# EAGLE board ProtoSnap-v14a (EAGLE 5.06)
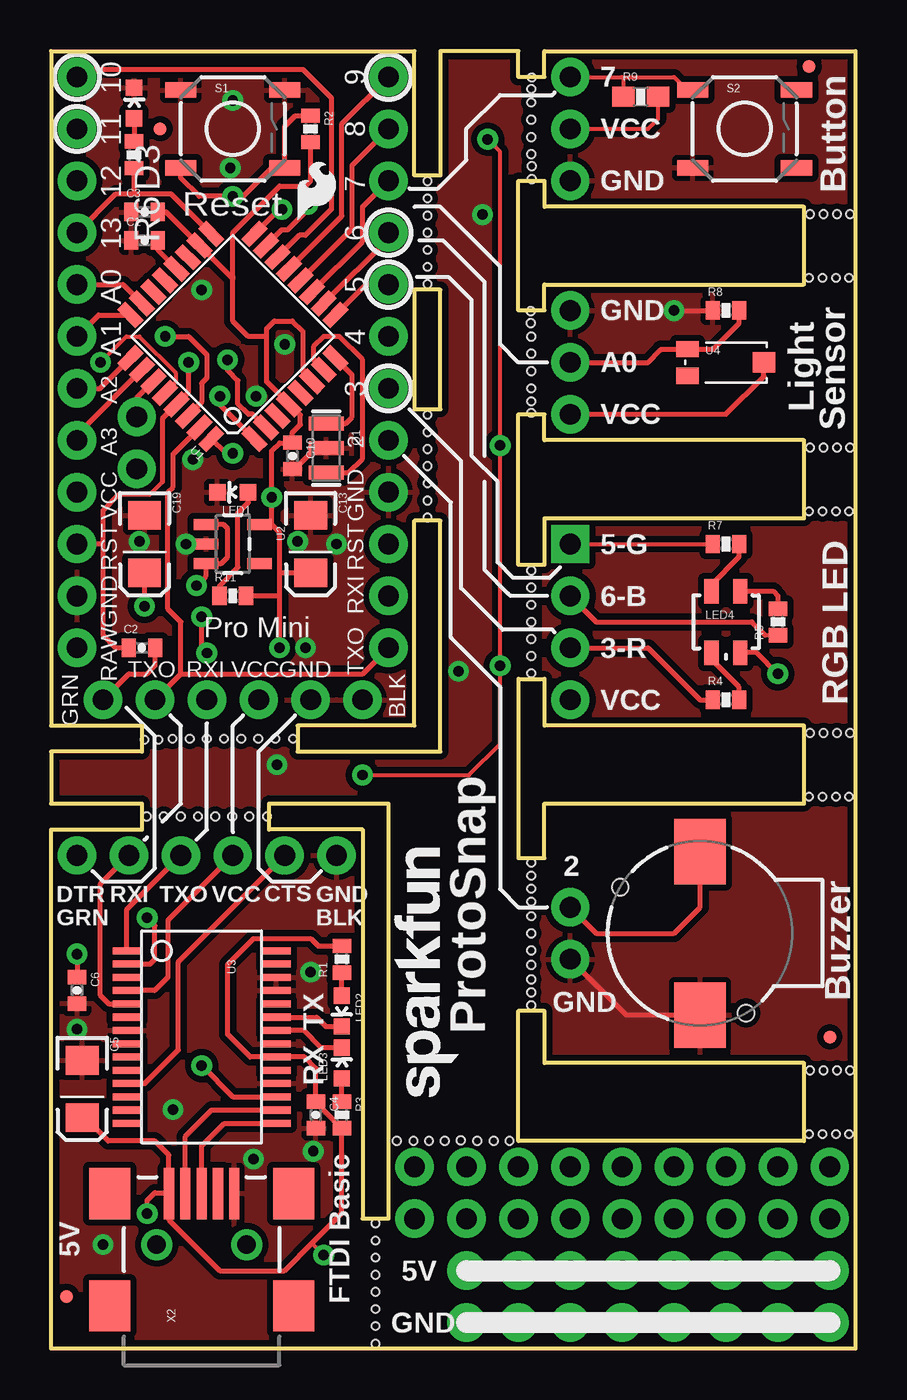
[diagram p0: board, top side]
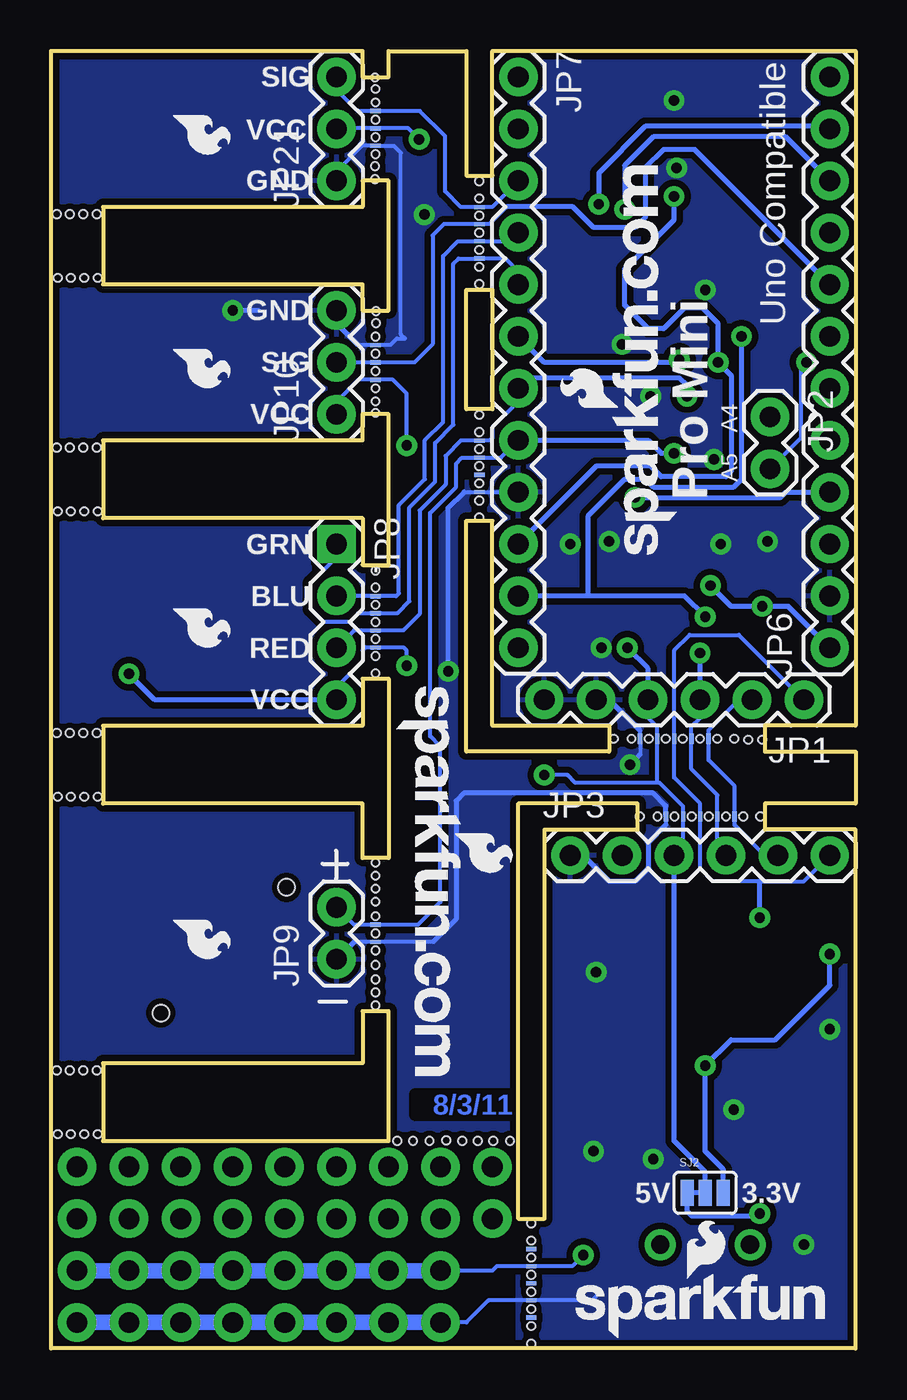
[diagram p1: board, bottom side, seen from below]

Size 39.37 x 63.5 mm. Coordinates in mm from the lower left corner, seen from the top.
Outline: 36.83,13.97 24.13,13.97 24.13,16.51 22.86,16.51 22.86,10.16 36.83,10.16 36.83,13.97
Outline: 24.13,26.67 36.83,26.67 36.83,30.48 24.13,30.48 24.13,32.77 22.86,32.77 22.86,24 24.13,24 24.13,26.67
Outline: 24.13,40.64 36.83,40.64 36.83,44.45 24.13,44.45 24.13,45.72 22.86,45.72 22.86,38.35 24.13,38.35 24.13,40.64
Outline: 36.83,55.88 24.13,55.88 24.13,57.15 22.86,57.15 22.86,50.8 24.13,50.8 24.13,52.07 36.83,52.07 36.83,55.88
Outline: 24.13,63.5 39.37,63.5 39.37,0 0,0 0,25.4 4.45,25.4 4.45,26.67 0,26.67 0,29.21 4.45,29.21 4.45,30.48 0,30.48 0,63.5 17.78,63.5 17.78,57.4 19.05,57.4 19.05,63.5 22.86,63.5 22.86,62.23 24.13,62.23 24.13,63.5
Outline: 17.78,30.48 17.78,40.51 19.05,40.51 19.05,29.21 12.06,29.21 12.06,30.48 17.78,30.48
Outline: 15.24,25.4 15.24,6.35 16.51,6.35 16.51,26.67 10.67,26.67 10.67,25.4 15.24,25.4
Outline: 17.78,45.97 19.05,45.97 19.05,51.82 17.78,51.82 17.78,45.97
Copper layers (1*16): Top 0.035mm / dielectric 1.5mm / Bottom 0.035mm
Design rules "SparkFun *": minimum track width 8mil, minimum drill 20mil, track to track 8mil, track to pad 8mil, pad to pad 8mil, via to via 8mil, smd to smd 8mil, copper to edge 8mil, drill to drill 8mil, minimum pad ring 12mil, minimum via ring 10mil, stop-mask expansion 4mil, vias tented up to drill 20mil, thermal gap 10mil
Net classes: 0 default: width 0.203 mm; 1 power: width 0.254 mm
Holes 0.38 mm at 19.25,10.16 20.85,10.16 21.67,10.16 20.04,10.19 22.43,10.16 5.26,29.79 4.57,29.79 16.92,10.16 17.73,10.16 18.49,10.16 23.5,18.77 23.5,18.06 23.5,22.5 23.5,21.87 23.5,46.35 23.5,45.8 23.47,50.19 23.47,50.77 23.52,57.86 23.52,57.23 23.5,61.65 23.52,62.2 23.5,23.77 23.5,23.14 23.5,17.42 23.5,16.79 37.8,55.52 38.46,55.52 39.09,55.52 37.13,55.52 37.74,52.4 38.4,52.4 39.04,52.4 37.08,52.4 37.8,44.09 38.46,44.09 39.09,44.09 37.13,44.09 37.74,40.97 38.4,40.97 39.04,40.97 37.08,40.97 37.8,30.12 38.46,30.12 39.09,30.12 37.13,30.12 37.74,27 38.4,27 39.04,27 37.08,27 37.8,13.61 38.46,13.61 39.09,13.61 37.13,13.61 37.74,10.49 38.4,10.49 39.04,10.49 37.08,10.49

## Footprints (pad centres in the part's own frame; a part is rotated, then mirrored left to right if it is on the bottom)
0402-CAP = smd 0.7 x 0.9: 1 -0.65,0; 2 0.65,0
EIA3216 = smd 1.4 x 1.6: A 1.4,0; C -1.4,0
LED-0603 = smd 0.8 x 0.8: A 0,-0.75; C 0,0.75
1X06 = drill 1.016 pad 1.88 round: 1 0,0; 2 2.54,0; 3 5.08,0; 4 7.62,0; 5 10.16,0; 6 12.7,0
1X02 = drill 1.016 pad 1.88 round: 1 0,0; 2 2.54,0
1X12 = drill 1.016 pad 1.88 round: 1 0,0; 2 2.54,0; 3 5.08,0; 4 7.62,0; 5 10.16,0; 6 12.7,0; 7 15.24,0; 8 17.78,0; 9 20.32,0; 10 22.86,0; 11 25.4,0; 12 27.94,0
1X04 = drill 1.016 pad 1.88 square: 1 0,0 | drill 1.016 pad 1.88 round: 2 2.54,0; 3 5.08,0; 4 7.62,0
1X03 = drill 1.016 pad 1.88 round: 1 0,0; 2 2.54,0; 3 5.08,0
FIDUCIAL-1X2.5 = smd 0.635 x 0.635: 1 0,0
LED-TRICOLOR-SMD = smd 0.7 x 1.2: A 0.7,-1.5; B 0.7,1.5; G -0.7,1.5; R -0.7,-1.5
RESONATOR-SMD = smd 0.7 x 1.7: 1 -1.2,0; 2 0,0; 3 1.2,0
0402-RES = smd 0.7 x 0.9: 1 -0.65,0; 2 0.65,0
0603-RES = smd 1.1 x 1: 1 -0.85,0; 2 0.85,0
TACTILE_SWITCH_SMD = smd 1.524 x 0.762: 1 -2.54,1.905; 2 2.54,1.905; 3 -2.54,-1.905; 4 2.54,-1.905
BUZZER-CCV = smd 3.2 x 2.5: + 4,0; - -4,0 | hole 0.8: -3.9,-2.25; 2.25,3.9
SJ_3 = smd 0.635 x 1.27: 1 -0.889,0; 2 0,0; 3 0.889,0
TQFP32-08 = smd 1.27 x 0.559: 1 -4.293,2.8; 2 -4.293,2; 3 -4.293,1.2; 4 -4.293,0.4; 5 -4.293,-0.4; 6 -4.293,-1.2; 7 -4.293,-2; 8 -4.293,-2.8; 17 4.293,-2.8; 18 4.293,-2; 19 4.293,-1.2; 20 4.293,-0.4; 21 4.293,0.4; 22 4.293,1.2; 23 4.293,2; 24 4.293,2.8 | smd 0.559 x 1.27: 9 -2.8,-4.293; 10 -2,-4.293; 11 -1.2,-4.293; 12 -0.4,-4.293; 13 0.4,-4.293; 14 1.2,-4.293; 15 2,-4.293; 16 2.8,-4.293; 25 2.8,4.293; 26 2,4.293; 27 1.2,4.293; 28 0.4,4.293; 29 -0.4,4.293; 30 -1.2,4.293; 31 -2,4.293; 32 -2.8,4.293
SOT23-5 = smd 0.55 x 1.2: 1 -0.95,-1.3; 2 0,-1.3; 3 0.95,-1.3; 4 0.95,1.3; 5 -0.95,1.3
SSOP28DB = smd 0.348 x 1.397: 1 -4.225,-3.656; 2 -3.575,-3.656; 3 -2.925,-3.656; 4 -2.275,-3.656; 5 -1.625,-3.656; 6 -0.975,-3.656; 7 -0.325,-3.656; 8 0.325,-3.656; 9 0.975,-3.656; 10 1.625,-3.656; 11 2.275,-3.656; 12 2.925,-3.656; 13 3.575,-3.656; 14 4.225,-3.656; 15 4.225,3.656; 16 3.575,3.656; 17 2.925,3.656; 18 2.275,3.656; 19 1.625,3.656; 20 0.975,3.656; 21 0.325,3.656; 22 -0.325,3.656; 23 -0.975,3.656; 24 -1.625,3.656; 25 -2.275,3.656; 26 -2.925,3.656; 27 -3.575,3.656; 28 -4.225,3.656
TEMT6000-SEN = smd 1.1 x 0.8: BASE -1.87,-0.65; EMITTER -1.87,0.65 | smd 1.1 x 1: COLLECTOR 1.86,0.01
MOUSE-BITE-3 = smd 0.203 x 0.508 bottom: P$1 -0.851,0; P$2 0,0; P$3 0.851,0 | hole 0.381: -1.27,0; -0.432,0; 0.432,0; 1.27,0
MOUSE-BITE-5 = smd 0.203 x 0.508 bottom: P$1 -1.689,0; P$2 -0.851,0; P$3 -0.013,0; P$4 0.826,0; P$5 1.664,0 | hole 0.381: -2.108,0; -1.27,0; -0.432,0; 0.406,0; 1.245,0; 2.083,0; -2.946,0; 2.946,0
MOUSE-BITE-2 = smd 0.203 x 0.508 bottom: P$1 -0.419,0; P$2 0.419,0 | hole 0.381: -0.838,0; 0,0; 0.838,0
MOUSE-BITE-4 = smd 0.203 x 0.508 bottom: P$1 -1.257,0; P$2 -0.419,0; P$3 0.419,0; P$4 1.257,0 | hole 0.381: -1.676,0; -0.838,0; 0,0; 0.838,0; 1.676,0; 2.515,0; -2.515,0
USB-MINIB-NOSTOP = smd 2.5 x 0.5: D+ 2.5,0; D- 2.5,0.8; GND 2.5,-1.6; ID 2.5,-0.8; VBUS 2.5,1.6 | smd 2.5 x 2: G1 -3,-4.5; G2 -3,4.5; G3 2.5,4.5; G4 2.5,-4.5 | drill 0.9 pad 0.8 round: H1 0,2.2 | drill 0.9 pad 0.787 round: H2 0,-2.2

## Placement (x,y rotation side)
C1  0.1uF  [0402-CAP]  4.57,54.23 0 top
C2  0.1uF  [0402-CAP]  4.45,34.29 0 top
C3  0.1uF  [0402-CAP]  4.57,55.63 0 top
C4  0.1uF  [0402-CAP]  12.95,11.43 270 top
C5  10uF  [EIA3216]  1.52,12.7 270 top
C6  0.1uF  [0402-CAP]  1.27,17.53 270 top
C10  0.1uF  [0402-CAP]  11.81,43.69 270 top
C13  10uF  [EIA3216]  12.7,39.37 270 top
C19  10uF  [EIA3216]  4.57,39.37 270 top
D3  Green  [LED-0603]  4.06,60.96 0 top
JP1  FTDI Basic  [1X06]  2.54,31.75 180 bottom
JP2  [1X02]  4.19,45.59 270 bottom
JP3  [1X06]  13.97,24.13 0 bottom
JP4  LOGO-SFENW2  [SFE-NEW-WEB]  13.72,0.51 0 bottom
JP5  LOGO-SFESK  [SFE-LOGO-FLAME]  8.26,3.43 0 bottom
JP6  [1X12]  1.27,34.29 90 bottom
JP7  [1X12]  16.51,62.23 270 bottom
JP8  [1X04]  25.4,39.37 270 bottom
JP9  [1X02]  25.4,19.05 90 bottom
JP10  [1X03]  25.4,45.72 90 bottom
JP11  LOGO-SFESK  [SFE-LOGO-FLAME]  33.4,20.95 270 bottom
JP12  LOGO-SFENW2  [SFE-NEW-WEB]  19.94,12.32 90 top
JP13  LOGO-SFESK  [SFE-LOGO-FLAME]  33.4,36.2 270 bottom
JP14  LOGO-SFESK  [SFE-LOGO-FLAME]  33.4,60.33 270 bottom
JP15  LOGO-SFESK  [SFE-LOGO-FLAME]  33.4,48.9 270 bottom
JP16  FIDUCIAL1X2.5  [FIDUCIAL-1X2.5]  0.76,2.54 0 top
JP18  LOGO-SFENEW  [SFE-NEW-WEBLOGO]  22.48,32.38 270 bottom
JP19  FIDUCIAL1X2.5  [FIDUCIAL-1X2.5]  5.33,59.69 0 top
JP20  FIDUCIAL1X2.5  [FIDUCIAL-1X2.5]  38.1,15.24 0 top
JP21  [1X03]  25.4,57.15 90 bottom
JP22  FIDUCIAL1X2.5  [FIDUCIAL-1X2.5]  37.08,62.74 0 top
LED1  Red  [LED-0603]  8.89,41.91 90 top
LED2  Red  [LED-0603]  14.22,16.51 180 top
LED3  Green  [LED-0603]  14.22,13.97 0 top
LED4  LED-TRICOLOR  [LED-TRICOLOR-SMD]  33.02,35.56 0 top
Q1  16MHz  [RESONATOR-SMD]  13.46,44.07 270 top
R1  1K  [0402-RES]  14.22,19.05 90 top
R2  10K  [0402-RES]  12.7,59.69 270 top
R3  1K  [0402-RES]  14.22,11.43 270 top
R4  200  [0402-RES]  33.02,31.75 0 top
R5  100  [0402-RES]  35.56,35.56 90 top
R6  330  [0402-RES]  4.06,58.42 90 top
R7  100  [0402-RES]  33.02,39.37 0 top
R8  10k  [0402-RES]  33.02,50.8 0 top
R9  10K  [0603-RES]  28.85,61.26 0 top
R11  10K  [0402-RES]  8.89,36.83 0 top
S1  Reset  [TACTILE_SWITCH_SMD]  8.89,59.69 0 top
S2  SWITCH-MOMENTARY-2SMD  [TACTILE_SWITCH_SMD]  33.93,59.69 0 top
SG1  BUZZERSMD2  [BUZZER-CCV]  31.75,20.32 90 top
SJ2  [SJ_3]  7.37,7.62 0 bottom
U1  ATMEGA328  [TQFP32-08]  8.89,49.53 135 top
U2  MIC5205  [SOT23-5]  8.89,39.37 270 top
U3  FT232RLSSOP  [SSOP28DB]  7.37,15.24 270 top
U4  TEMT6000  [TEMT6000-SEN]  33.02,48.26 0 top
U$1  LOGO-SFESK  [SFE-LOGO-FLAME]  12.06,55.24 0 top
U$2  MOUSE-BITE-3  [MOUSE-BITE-3]  23.5,59.72 90 top
U$4  MOUSE-BITE-5  [MOUSE-BITE-5]  15.88,3.17 270 top
U$7  MOUSE-BITE-2  [MOUSE-BITE-2]  23.5,20.32 270 top
U$8  MOUSE-BITE-4  [MOUSE-BITE-4]  23.5,35.56 90 top
U$9  MOUSE-BITE-3  [MOUSE-BITE-3]  23.5,48.26 90 top
U$11  LOGO-SFENEW  [SFE-NEW-WEBLOGO]  8.76,38.86 90 bottom
U$13  MOUSE-BITE-4  [MOUSE-BITE-4]  18.41,54.61 90 top
U$14  MOUSE-BITE-4  [MOUSE-BITE-4]  18.41,43.18 90 top
U$22  MOUSE-BITE-5  [MOUSE-BITE-5]  8.89,29.84 0 top
U$23  MOUSE-BITE-5  [MOUSE-BITE-5]  7.62,26.04 0 top
X2  USB-SMD-NS  [USB-MINIB-NOSTOP]  7.37,5.08 90 top

## Library data of the parts
C1-C6 C10 C13 C19 D3 JP1-JP15 JP18 JP21 LED1-LED4 Q1 R1-R9 R11 S1 S2 SG1 SJ2 U1-U4 U$1 U$2 U$4 U$7-U$9 U$11 U$13 U$14 U$22 U$23 X2 = SparkFun
JP16 JP19 JP20 JP22 = abes

## Nets
3.3V [power]: C6.1 SJ2.3 U3.17
5V: C4.1 C5.A R1.2 R3.2 SJ2.1 U3.20 U$4.P$2 X2.VBUS
A0: JP6.8 JP10.2 R8.2 U1.23 U4.EMITTER U$9.P$2 U$13.P$3
A1: JP6.7 U1.24
A2: JP6.6 U1.25
A3: JP6.5 U1.26
A4: JP2.1 U1.27
A5: JP2.2 U1.28
AREF: C1.2 U1.20
CTS: JP3.2 U3.11
D2: JP7.8 JP9.2 SG1.+ U1.32 U$7.P$1 U$14.P$3
D3: JP7.7 JP8.3 R4.1 U1.1 U$8.P$2 U$14.P$4
D4: JP7.6 U1.2
D5: JP7.5 JP8.1 R7.1 U1.9 U$8.P$3 U$13.P$1
D6: JP7.4 JP8.2 R5.1 U1.10 U$8.P$4 U$13.P$2
D7: JP7.3 JP21.3 R9.1 S2.1 U1.11 U$2.P$3 U$13.P$4
D8: JP7.2 U1.12
D9: JP7.1 U1.13
D10: JP6.12 U1.14
DTR: C2.2 JP1.1 JP3.6 U3.2 U$22.P$3 U$23.P$3
GND [power]: C1.1 C3.1 C4.2 C5.C C6.2 C10.2 C13.C C19.C D3.C JP1.5 JP1.6 JP3.1 JP6.2 JP7.9 JP9.1 JP10.3 JP21.1 LED1.C Q1.2 R8.1 S1.1 S1.2 S2.3 SG1.- U1.3 U1.5 U1.21 U2.2 U3.7 U3.18 U3.21 U3.25 U3.26 U$2.P$1 U$4.P$4 U$7.P$2 U$9.P$3 U$14.P$1 U$22.P$5 U$23.P$5 X2.GND
MISO: JP6.10 U1.16
MOSI: JP6.11 U1.15
N$1: Q1.1 U1.8
N$2: Q1.3 U1.7
N$3: LED2.A R1.1
N$4: LED3.A R3.1
N$6: LED4.R R4.2
N$7: D3.A R6.2
N$8: LED4.B R5.2
N$9: LED4.G R7.2
N$38: LED1.A R11.1
RAW [power]: C19.A JP6.1 U2.1 U2.3
RESET: C2.1 JP6.3 JP7.10 R2.1 S1.3 S1.4 U1.29
RX-I: JP1.2 JP3.5 JP7.12 U1.31 U3.5 U$22.P$1 U$23.P$1
RXLED: LED3.C U3.22
SCK: JP6.9 R6.1 U1.17
TX-O: JP1.3 JP3.4 JP7.11 U1.30 U3.1 U$22.P$2 U$23.P$2
TXLED: LED2.C U3.23
USB_D+: U3.15 X2.D+
USB_D-: U3.16 X2.D-
VCC: C3.2 C10.1 C13.A JP1.4 JP3.3 JP6.4 JP8.4 JP10.1 JP21.2 LED4.A R2.2 R9.2 R11.2 SJ2.2 U1.4 U1.6 U1.18 U2.5 U3.4 U4.COLLECTOR U$2.P$2 U$8.P$1 U$9.P$1 U$22.P$4 U$23.P$4

## Tracks (layer width: path | path; a pad name or v marks a point on that pad's centre or on a via)
3.3V  (via drill 0.51)
  Top 0.254: U3.17 8.89,12.31 v7.37,13.84 | v1.27,19.3 C6.1
  Bottom 0.254: SJ2.3 6.48,8.76 7.37,9.65 v7.37,13.84 6.1,15.11 3.94,15.11 1.27,17.78 v1.27,19.3
5V  (via drill 0.51, 1.02 pad 1.88)
  Top 0.203: v13.34,4.57 12.83,5.08 12.83,5.21
  Top 0.254: C5.A 1.65,11.3 2.79,10.16 5.08,10.16 5.77,9.47 X2.VBUS | R1.2 13.07,19.7 12.7,20.07 9.91,20.07 8.64,18.8 8.64,15.37 9.74,14.27 U3.20 12.4,14.27 12.95,13.72 C4.1 12.95,12.05 R3.2 14.22,6.6 12.83,5.21 11.43,3.81 8.26,3.81 5.77,6.3 X2.VBUS | v4.7,6.6 4.7,7.24 5.08,7.62 5.73,7.62 X2.VBUS
  Bottom 0.203: v13.34,4.57 13.88,4.03 U$4.P$2 17.56,4.03 17.78,3.81 v20.32,3.81
  Bottom 0.254: SJ2.1 8.26,6.73 8,6.48 4.83,6.48 v4.7,6.6
  Bottom 0.762: v20.32,3.81 v22.86,3.81 v25.4,3.81 v27.94,3.81 v30.48,3.81 v33.02,3.81 v35.56,3.81 v38.1,3.81
A0
  Top 0.203: JP6.8 1.26,52.08
  Top 0.254: R8.2 33.67,50.18 32.4,48.91 U4.EMITTER 29.83,48.91 29.83,48.88 29.21,48.26 JP10.2 | JP6.8 3.52,52.07 U1.23
  Bottom 0.203: JP10.2 U$9.P$2 21.59,48.26 20.7,49.15 20.7,54.48 20.16,55.03 U$13.P$3 17.93,55.03 17.08,55.88
  Bottom 0.254: 17.08,55.88 13.84,55.88 12.83,54.86 10.79,54.86 10.29,55.37 10.29,57.78 9.4,58.67 7.87,58.67 JP6.8
A1
  Top 0.254: U1.24 2.33,50.59 JP6.7
A2
  Top 0.254: U1.25 2.39,46.99 JP6.6
A3
  Top 0.254: U1.26 1.27,44.74 JP6.5
A4
  Top 0.254: U1.27 4.19,46.53 JP2.1
A5  (via drill 0.51)
  Top 0.203: U1.28 6.1,47.3 6.1,47.75 4.32,49.53 3.68,49.53 v2.41,48.26
  Bottom 0.203: v2.41,48.26 2.67,48.01 2.67,44.58 JP2.2
AREF
  Top 0.254: C1.2 5.22,53.76 U1.20
CTS
  Top 0.254: U3.11 4.58,12.96 6.22,14.61 6.22,18.92 JP3.2
D2  (via drill 0.51)
  Top 0.254: v8.89,43.81 8.53,43.81 U1.32 | SG1.+ 31.75,21.59 30.48,20.32 26.67,20.32 JP9.2
  Bottom 0.203: JP9.2 24.55,20.74 U$7.P$1 21.43,20.74 20.32,21.84 20.32,29.46 20.83,29.97 20.83,40.89 19.56,42.16 19.56,43.31 19.27,43.6 U$14.P$3 17.36,43.6 JP7.8
  Bottom 0.254: JP7.8 10.16,44.45 9.53,43.81 v8.89,43.81
D3  (via drill 0.51)
  Top 0.254: R4.1 31.75,31.75 29.21,34.29 JP8.3 | v8.26,46.61 8.26,46.2 U1.1
  Bottom 0.203: JP8.3 24.55,35.14 U$8.P$2 22.14,35.14 21.34,35.94 21.34,41.02 20.07,42.29 20.07,43.69 19.32,44.44 U$14.P$4 17.92,44.44 17.78,44.58 17.78,45.09 16.51,46.35 JP7.7
  Bottom 0.254: v8.26,46.61 8.26,47.12 8.64,47.5 16,47.5 JP7.7
D4  (via drill 0.51)
  Top 0.254: v8.64,48.39 8.64,47.88 9.14,47.37 9.14,46.23 9.65,45.72 9.87,45.72 U1.2
  Bottom 0.254: JP7.6 15.24,48.26 8.76,48.26 v8.64,48.39
D5
  Top 0.203: JP8.1 R7.1
  Top 0.254: U1.9 15.39,52.07 JP7.5
  Bottom 0.203: JP8.1 25.4,38.73 26.67,37.47 26.67,36.2 26.04,35.56 24.77,35.56 24.35,35.98 U$8.P$3 22.44,35.98 21.84,36.58 21.84,41.15 20.57,42.42 20.57,44.32 19.68,45.21 19.68,53.09 19.43,53.34 18.43,53.34 U$13.P$1 17.16,53.35 16.51,52.7 JP7.5
D6
  Top 0.203: 34.94,34.91 R5.1
  Top 0.254: U1.10 16.51,54.32 JP7.4 | 34.94,34.91 34.29,35.56 26.67,35.56 JP8.2
  Bottom 0.203: JP8.2 25.39,36.82 U$8.P$4 22.49,36.82 22.35,36.96 22.35,41.27 21.08,42.55 21.08,44.45 20.19,45.34 20.19,53.47 19.47,54.19 U$13.P$2 16.93,54.19 JP7.4 16.82,54.3
D7
  Top 0.203: S2.1 31.11,61.59 30.48,62.23 27.94,62.23 | R9.1 28,62.17 27.94,62.23 | JP21.3 27.94,62.23
  Top 0.254: U1.11 15.24,54.18 15.24,55.88 JP7.3
  Bottom 0.203: JP7.3 17.79,55.87 U$13.P$4 19.32,55.87 20.09,56.64 20.09,59.33 21.32,60.57 U$2.P$3 24.37,60.57 25.4,61.59 JP21.3
D8
  Top 0.254: U1.12 14.73,54.81 14.73,57.91 JP7.2
D9
  Top 0.254: U1.13 14.22,55.43 14.22,59.94 JP7.1
D10
  Top 0.254: JP6.12 1.65,62.61 12.32,62.61 13.72,61.21 13.72,55.75 12.45,54.48 12.15,54.48 U1.14
DTR  (via drill 0.51)
  Top 0.254: JP1.1 3.81,33.02 4.7,33.02 5.09,33.42 C2.2 | U3.2 4.84,18.82 5.08,19.05 5.08,20.7 v4.7,21.08
  Bottom 0.203: JP3.6 2.54,22.86 4.7,22.86 6.99,22.86 7.61,23.48 U$23.P$3 7.62,26.67 8.89,27.94 8.88,27.95 U$22.P$3 8.88,34.18 8.13,34.92 5.71,34.92 JP1.1
  Bottom 0.254: v4.7,21.08 4.7,22.86
GND  (via drill 0.51, 1.02 pad 1.88)
  Top 0.254: C3.1 3.81,55.63 | 3.81,54.04 3.81,54.23 | C10.2 11.92,43.04 12.95,44.07 Q1.2 | U2.2 v6.6,39.37 | SG1.- 28.13,16.32 JP9.1 | v30.48,50.8 R8.1
  Bottom 0.203: U$23.P$5 9.28,26.45 | 10.55,30.24 U$22.P$5 10.55,29.07 | U$23.P$5 9.28,25.64 | 24.55,19.9 U$7.P$2 20.66,19.9 | 24.35,49.11 U$9.P$3 22.77,49.11 22.45,49.43 22.05,49.43 22.25,49.63 22.25,58.52 22.58,58.85 U$2.P$1 24.17,58.86 25.4,57.63 JP21.1 | 19.16,41.92 U$14.P$1 16.52,41.92 JP7.9 | U$23.P$5 9.3,26.05 | v20.32,1.27 19.05,1.27 17.97,2.35 U$4.P$4 12.89,2.35 12.7,2.54
  Bottom 0.254: 9.28,25.64 10.16,24.77 10.16,23.5 10.79,22.86 12.06,22.86 13.34,24.13 JP3.1 | 20.66,19.9 19.56,21.01 19.56,26.8 19.18,27.18 9.91,27.18 9.28,26.56 U$23.P$5 | 10.55,30.24 12.06,31.75 JP1.5 | 10.55,29.07 v11.05,28.57 | 24.55,19.9 JP9.1 | 29.21,50.8 v30.48,50.8 | JP10.3 25.4,50.16 24.35,49.11 | v19.94,33.15 19.94,41.15 19.16,41.92
  Bottom 0.762: v20.32,1.27 v22.86,1.27 v25.4,1.27 v27.94,1.27 v30.48,1.27 v33.02,1.27 v35.56,1.27 v38.1,1.27
  other vias: 7.37,51.82 8.89,61.09 12.45,34.29 6.93,43.51 11.43,49.15 4.32,39.5 10.03,46.61 13.97,39.37 12.06,39.5 12.7,18.41 2.54,5.08 9.91,9.27 1.27,15.62 12.83,9.65 5.97,11.68 8.76,57.78 21.11,55.5
  pour Top (isolate 0.305): 15.24,25.4 0,25.4 0,0 15.24,0
  pour Bottom (isolate 0.305): 15.24,25.4 0,25.4 0,0 15.24,0
  pour Top (isolate 0.305): 0,30.48 0,63.5 17.78,63.5 17.78,30.48
  pour Bottom (isolate 0.305): 0,30.48 0,63.5 17.78,63.5 17.78,30.48
  pour Top (isolate 0.305): 24.13,52.07 24.13,44.45 39.37,44.45 39.37,52.07
  pour Bottom (isolate 0.305): 24.13,52.07 24.13,44.45 39.37,44.45 39.37,52.07
  pour Bottom (isolate 0.305): 24.13,63.5 24.13,55.88 39.37,55.88 39.37,63.5
  pour Top (isolate 0.305): 24.13,63.5 24.13,55.88 39.37,55.88 39.37,63.5
  pour Top (isolate 0.305): 24.13,40.64 24.13,30.48 39.37,30.48 39.37,40.64
  pour Bottom (isolate 0.305): 24.13,26.67 24.13,13.97 39.37,13.97 39.37,26.67
  pour Top (isolate 0.305): 24.13,26.67 24.13,13.97 39.37,13.97 39.37,26.67
  pour Bottom (isolate 0.305): 24.13,40.64 24.13,30.48 39.37,30.48 39.37,40.64
  pour Top (isolate 0.305): 0,63.5 0,0 16.51,0 16.51,10.16 39.37,10.16 39.37,63.5
  pour Bottom (isolate 0.305): 0,63.5 0,0 16.51,0 16.51,10.16 39.37,10.16 39.37,63.5
MISO  (via drill 0.51)
  Top 0.254: U1.16 11.15,55.75 v11.3,55.75
  Bottom 0.254: v11.3,55.75 11.3,57.91 9.91,59.31 3.43,59.31 JP6.10
MOSI  (via drill 0.51)
  Top 0.254: U1.15 11.27,54.74 11.56,54.74 12.57,55.75 v12.57,56.01
  Bottom 0.254: JP6.11 1.4,59.82 10.29,59.82 12.57,57.53 v12.57,56.01
N$1
  Top 0.254: Q1.1 14.41,45.27 14.73,45.59 14.73,47.65 | 14.73,47.65 | 14.73,47.65 U1.8
N$2
  Top 0.254: Q1.3 14.55,42.87 15.24,43.56 15.24,48.39 14.1,49.53 13.34,49.53 12.83,49.02 12.83,48.42 U1.7
N$3
  Top 0.254: LED2.A R1.1
N$4
  Top 0.254: R3.1 LED3.A
N$5
  Bottom 0.254: 7.37,7.62 8.26,7.62
N$6
  Top 0.254: R4.2 33.67,32.37 32.32,33.72 LED4.R
N$7
  Top 0.254: D3.A R6.2
N$8
  Top 0.254: LED4.B 35.33,37.06 35.56,36.83 R5.2
N$9
  Top 0.254: LED4.G 32.32,37.4 33.67,38.75 R7.2
N$10  (via drill 1.02 pad 1.88)
  other vias: 38.1,8.89
N$11  (via drill 1.02 pad 1.88)
  other vias: 35.56,8.89
N$12  (via drill 1.02 pad 1.88)
  other vias: 33.02,8.89
N$13  (via drill 1.02 pad 1.88)
  other vias: 30.48,8.89
N$14  (via drill 1.02 pad 1.88)
  other vias: 27.94,8.89
N$15  (via drill 1.02 pad 1.88)
  other vias: 25.4,8.89
N$16  (via drill 1.02 pad 1.88)
  other vias: 22.86,8.89
N$17  (via drill 1.02 pad 1.88)
  other vias: 20.32,8.89
N$18  (via drill 1.02 pad 1.88)
  other vias: 17.78,8.89
N$27  (via drill 1.02 pad 1.88)
  other vias: 38.1,6.35
N$28  (via drill 1.02 pad 1.88)
  other vias: 35.56,6.35
N$29  (via drill 1.02 pad 1.88)
  other vias: 33.02,6.35
N$30  (via drill 1.02 pad 1.88)
  other vias: 30.48,6.35
N$31  (via drill 1.02 pad 1.88)
  other vias: 27.94,6.35
N$32  (via drill 1.02 pad 1.88)
  other vias: 25.4,6.35
N$33  (via drill 1.02 pad 1.88)
  other vias: 22.86,6.35
N$34  (via drill 1.02 pad 1.88)
  other vias: 20.32,6.35
N$38
  Top 0.254: R11.1 8.24,37.32 9.14,38.23 9.14,40.89 9.65,41.4 9.65,41.91 LED1.A
NET1  (via drill 1.02 pad 1.88)
  other vias: 17.78,6.35
RAW  (via drill 0.51)
  Top 0.254: v4.57,36.32 C19.A | U2.1 8.45,40.32 8.64,40.13 8.64,38.73 8.32,38.42 U2.3 7.59,37.82 v7.11,37.34
  Bottom 0.254: JP6.1 3.3,36.32 v4.57,36.32 6.1,36.32 v7.11,37.34
RESET  (via drill 0.51)
  Top 0.203: 3.3,41.78 4.83,41.78 5.46,42.42
  Top 0.254: R2.1 12.69,60.33 11.94,60.33 11.43,59.82 S1.4 10.79,57.78 9.4,56.39 v8.89,56.39 7.24,56.39 6.35,57.28 S1.3 | v6.73,48.26 6.73,46.8 U1.29 5.46,45.53 5.46,42.42 | C2.1 3.17,34.29 2.54,34.92 2.54,39.37 | 2.54,39.37 JP6.3 | 2.54,39.37 2.54,41.02 3.3,41.78
  Bottom 0.254: v8.89,56.39 8.89,55.24 11.3,52.83 11.3,51.05 10.16,49.91 9.4,49.91 8.38,50.93 7.49,50.93 6.73,50.16 v6.73,48.26 6.1,47.62 6.1,42.93 6.35,42.67 9.53,42.67 10.03,43.18 12.7,43.18 JP7.10
RX-I
  Top 0.254: JP7.12 15.24,33.02 6.35,33.02 | 6.35,33.02 6.35,35.56 5.71,36.2 5.71,41.91 5.97,42.16 5.97,43.78 U1.31 | JP1.2 6.35,33.02 | U3.5 2.82,16.86 2.41,17.27 2.41,22.73 JP3.5
  Bottom 0.203: JP3.5 4.45,24.13 5.93,25.62 U$23.P$1 5.93,27.52 7.2,28.79 U$22.P$1 7.2,30.26 5.71,31.75 JP1.2
RXLED
  Top 0.254: U3.22 12.38,15.56 13.22,14.72 LED3.C
SCK
  Top 0.254: 4.06,56.52 3.17,56.52 JP6.9 | 4.06,56.52 R6.1 | 4.06,56.52 5.87,56.52 U1.17
TX-O  (via drill 0.51)
  Top 0.254: U1.30 7.37,46.31 7.37,47.24 7.62,47.5 7.62,48.64 6.73,49.53 v5.59,49.53 | U3.1 3.71,21.49 JP3.4 | 7.49,34.16 v7.62,34.04 7.37,34.29 v7.37,35.81
  Bottom 0.203: JP1.3 7.62,30.86 8.04,30.44 U$22.P$2 8.04,28.36 6.77,27.09 U$23.P$2 6.77,24.55 JP3.4
  Bottom 0.254: 13.08,36.83 JP7.11 | v5.59,49.53 5.59,42.55 5.97,42.16 9.91,42.16 10.29,42.55 11.3,42.55 13.08,40.77 13.08,36.83 | JP1.3 v7.62,34.04 | 13.08,36.83 8.38,36.83 v7.37,35.81
TXLED
  Top 0.254: LED2.C 13.45,15.76 12.99,16.21 U3.23
USB_D+
  Top 0.254: X2.D+ 7.37,9.91 8.47,11.02 U3.15
USB_D-
  Top 0.254: U3.16 7.86,11.66 6.57,10.38 X2.D-
VCC  (via drill 0.51)
  Top 0.203: U4.COLLECTOR | v15.24,28.07 20.45,28.07 21.97,29.59 v21.97,33.41 v21.97,44.2 21.97,58.57 v21.36,59.18 | R9.2 29.7,60.18 29.21,59.69 JP21.2
  Top 0.254: C13.A 11.18,37.97 | 8.89,52.36 8.84,52.41 8.89,52.45 | R2.2 12.7,57.15 12.45,56.9 11.18,56.9 8.89,54.61 8.89,52.45 | 8.89,52.36 8.89,52.45 | 5.08,55.63 C3.2 5.62,55.63 | 10.79,40.32 U2.5 | 11.79,46.09 12.19,45.69 12.19,45.21 11.81,44.83 C10.1 11.83,44.34 11.81,44.32 11.18,44.32 10.79,43.94 v10.79,41.66 10.79,40.32 | 11.79,46.09 11.67,46.21 U1.4 | 10.79,40.32 11.18,39.94 11.18,37.97 | v11.18,34.29 11.18,36.83 | 11.18,36.83 11.18,37.97 | 11.18,36.83 R11.2 | 10.54,49.53 10.54,49.91 10.92,50.29 11.81,50.29 12.32,49.78 12.32,47.8 U1.6 | 10.54,49.53 9.65,49.53 8.89,50.29 8.89,52.36 | 5.62,55.63 | 5.62,55.63 U1.18 8.89,52.36 | 10.54,49.53 10.54,47.31 U1.4 | 11.79,46.09 11.77,46.09 U1.4 | U3.4 5.07,17.52 5.71,18.16 5.71,20.95 JP3.3 | LED4.A 34.52,34.06 v35.56,33.02 | U4.COLLECTOR 34.87,47.57 33.02,45.72 JP10.1
  Bottom 0.203: 8.88,24.14 JP3.3 8.45,24.57 U$23.P$4 8.45,26.53 9.6,27.69 9.72,27.69 | 10.15,31.74 JP1.4 10.16,30.86 9.72,30.42 U$22.P$4 9.72,27.69 | JP8.4 25.4,32.38 24.13,33.66 24.13,34.16 23.99,34.3 U$8.P$1 22.11,34.3 21.97,34.16 v21.97,33.41 | JP10.1 25.4,46.35 24.35,47.41 U$9.P$1 22.64,47.41 21.97,46.74 v21.97,44.2 | 9.72,27.69 13.72,27.69 14.1,28.07 v15.24,28.07 | v21.36,59.18 21.89,59.72 U$2.P$2 25.38,59.72 JP21.2
  Bottom 0.254: 10.79,41.53 v10.79,41.66 3.68,41.66 3.43,41.91 JP6.4 | JP1.4 10.16,33.27 v11.18,34.29 | SJ2.2 7.37,8.64 8.89,10.16 JP3.3 | v35.56,33.02 34.29,31.75 JP8.4

## Text on the board
Bottom: 8/3/11
tPlace: 10 | 9 | 7 | 11 | 8 | VCC | 12 | Reset | 7 | GND | Button | 13 | 6 | A0 | 5 | A1 | 4 | GND | A2 | A0 | 3 | Light | A3 | 2 | VCC | Sensor | VCC | GND | RST | RST | 5-G | GND | RXI | Pro Mini | 6-B | RAW | TXO | TXO | RXI | VCC | GND | 3-R | GRN | BLK | VCC | RGB LED | 2 | DTR | RXI | TXO | VCC | CTS | GND | GRN | BLK | TX | Buzzer | GND | RX | ProtoSnap | FTDI Basic | 5V | 5V | GND
bPlace: Uno Compatible | SIG | VCC | GND | GND | SIG | A4 | VCC | A5 | Pro Mini | GRN | BLU | RED | VCC | 3.3V | 5V